# EAGLE board dpager (EAGLE 7.2.0)
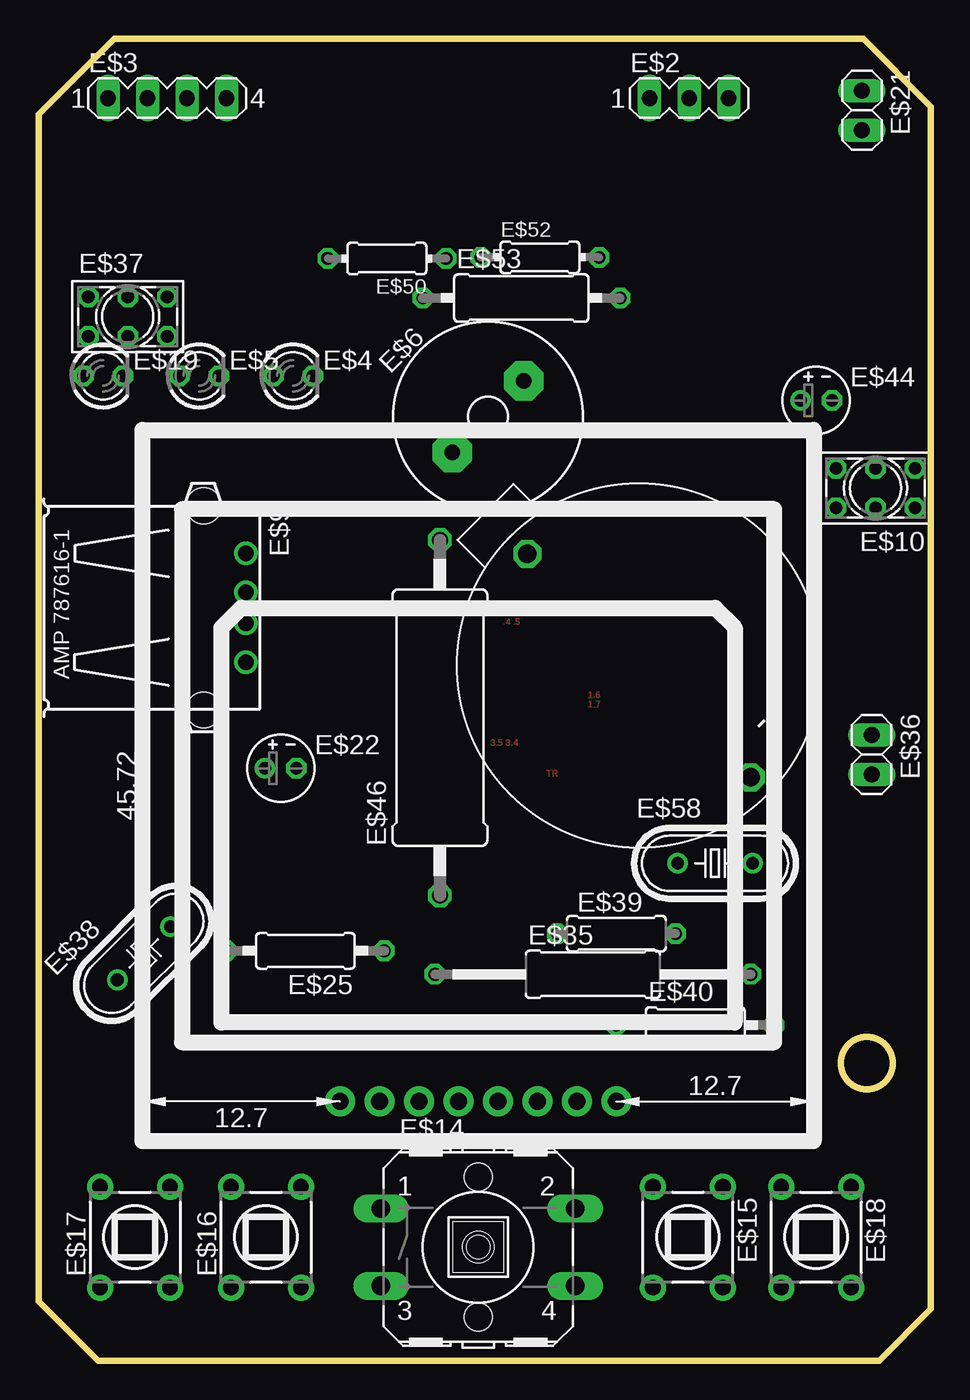
[diagram p0: board, top side]
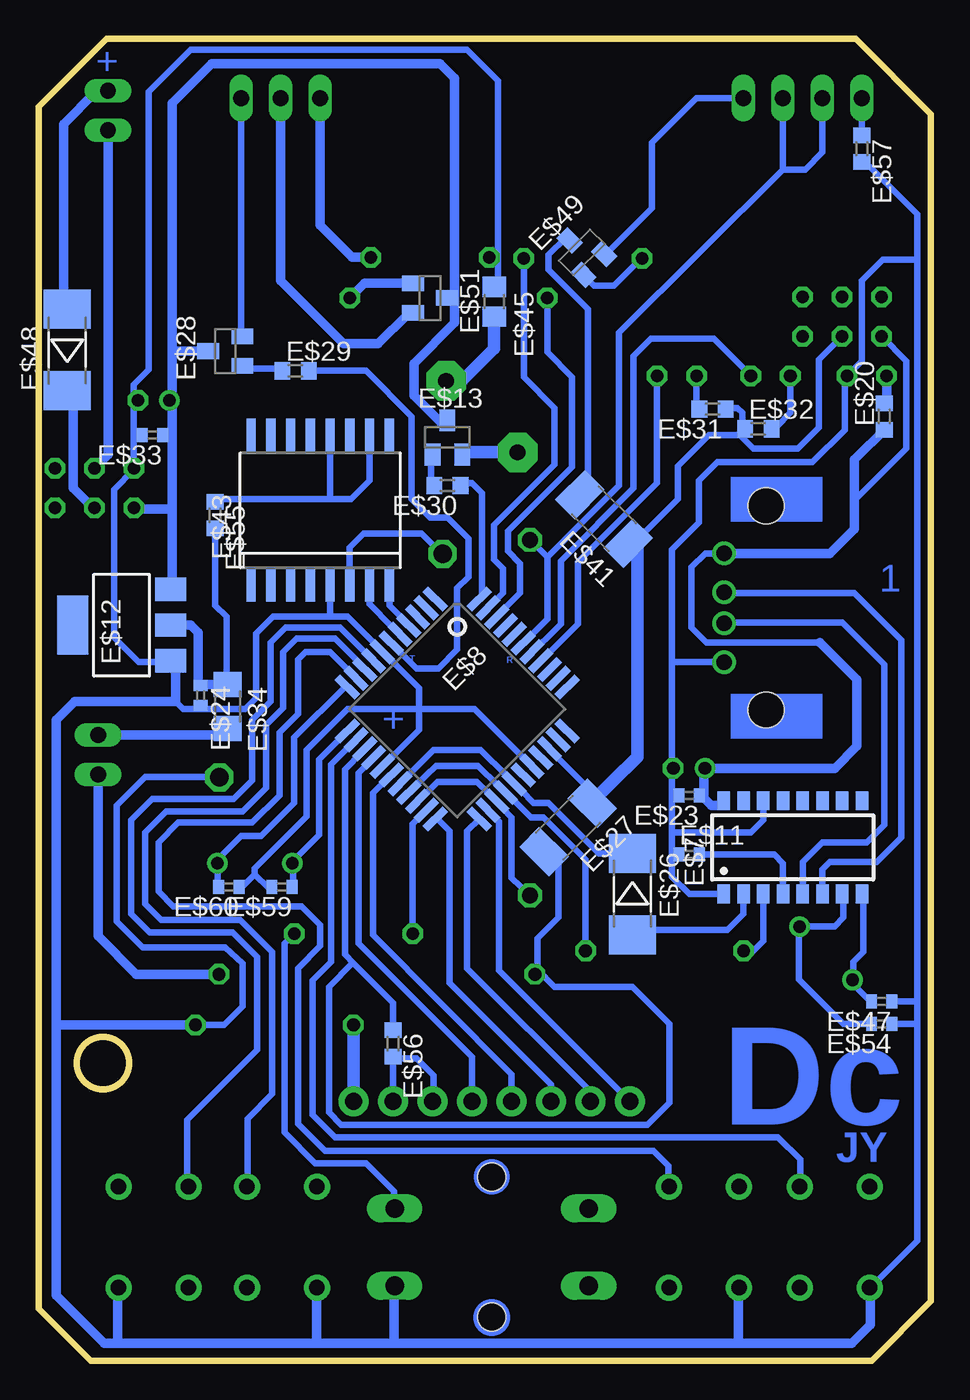
[diagram p1: board, bottom side, seen from below]

Size 57.39 x 85.01 mm. Coordinates in mm from the lower left corner, seen from the top.
Outline: 4.84,85.01 53.02,85.01 57.39,80.64 57.39,3.33 54.05,0 3.81,0 0,3.81 0,80.17 4.84,85.01
Outline: circle at 53.26,19.13 radius 1.67
Copper layers (1*16): Top 0.035mm / dielectric 1.5mm / Bottom 0.035mm
Design rules "default": minimum track width 10mil, minimum drill 24mil, track to track 8mil, track to pad 8mil, pad to pad 8mil, via to via 8mil, smd to smd 8mil, copper to edge 40mil, drill to drill 8mil, minimum pad ring 10mil, minimum via ring 8mil, stop-mask expansion 4mil, vias tented up to drill 0mil, thermal gap 10mil
tRestrict: area 59.7,72.6 to 60.3,74.1; area 59.7,-0.1 to 60.3,1.4; area 60.4,33.2 to 62.4,40.8; area 56,75.1 to 57.5,75.7; area 0,75.1 to 1.5,75.7; area 25.5,73.3 to 32,75; area -3,72.6 to -2.4,74.1; area -3,55 to -2.4,56.5; area -2.3,61.1 to -0.5,68; area -5.7,53.4 to -5.1,54.9; area -5.7,41.7 to -5.1,43.2; area -5,44.8 to -3.2,51.8; 60 more areas; 73 lines

## Footprints (pad centres in the part's own frame; a part is rotated, then mirrored left to right if it is on the bottom)
NOKIA5110 = drill 1.1 pad 1.93: P$1 0,0; P$2 2.54,0; P$3 5.08,0; P$4 7.62,0; P$5 10.16,0; P$6 12.7,0; P$7 15.24,0; P$8 17.78,0
MA03-1 = drill 1.016 long: 1 -2.54,0; 2 0,0; 3 2.54,0
MA04-1 = drill 1.016 long: 1 -3.81,0; 2 -1.27,0; 3 1.27,0; 4 3.81,0
LED3MM = drill 0.813 octagon: A -1.27,0; K 1.27,0
AL60P = drill 1.016 pad 2.54 octagon: 1 -3.251,0; 2 3.251,0
SOP16 = smd 0.8 x 1.2: 1 -4.445,-3; 2 -3.175,-3; 3 -1.905,-3; 4 -0.635,-3; 5 0.635,-3; 6 1.905,-3; 7 3.175,-3; 8 4.445,-3; 9 4.445,3; 10 3.175,3; 11 1.905,3; 12 0.635,3; 13 -0.635,3; 14 -1.905,3; 15 -3.175,3; 16 -4.445,3
QFP44 = smd 0.5 x 1.8: 1 -4,-6; 2 -3.2,-6; 3 -2.4,-6; 4 -1.6,-6; 5 -0.8,-6; 6 0,-6; 7 0.8,-6; 8 1.6,-6; 9 2.4,-6; 10 3.2,-6; 11 4,-6; 23 4,6; 24 3.2,6; 25 2.4,6; 26 1.6,6; 27 0.8,6; 28 0,6; 29 -0.8,6; 30 -1.6,6; 31 -2.4,6; 32 -3.2,6; 33 -4,6 | smd 1.8 x 0.5: 12 6,-4; 13 6,-3.2; 14 6,-2.4; 15 6,-1.6; 16 6,-0.8; 17 6,0; 18 6,0.8; 19 6,1.6; 20 6,2.4; 21 6,3.2; 22 6,4; 34 -6,4; 35 -6,3.2; 36 -6,2.4; 37 -6,1.6; 38 -6,0.8; 39 -6,0; 40 -6,-0.8; 41 -6,-1.6; 42 -6,-2.4; 43 -6,-3.2; 44 -6,-4
USB = drill 1: 1 -3.5,12.99; 2 -1,12.99; 3 1,12.99; 4 3.5,12.99 | hole 2.3: -6.57,10.28; 6.57,10.28
9450-2 = drill 0.813 octagon: 1 -2.54,-1.27; 2 0,-1.27; 3 2.54,-1.27; 4 -2.54,1.27; 5 0,1.27; 6 2.54,1.27
C0402 = smd 0.7 x 0.9: 1 -0.65,0; 2 0.65,0
SOT223 = smd 1.5 x 2: 1 -2.3,-3.15; 2 0,-3.15; 3 2.3,-3.15 | smd 3.8 x 2: 4 0,3.15
SOT23 = smd 1 x 1.4: 1 -0.95,-1.1; 2 0.95,-1.1; 3 0,1.1
B3F-40XX = drill 1.194 long: 1 -6.248,2.489; 2 6.248,2.489; 3 -6.248,-2.489; 4 6.248,-2.489 | hole 1.803: 0,-4.496; 0,4.496
TL1105SP = drill 1 pad 1.676: 1 -2.25,3.25; 2 2.25,3.25; 3 -2.25,-3.25; 4 2.25,-3.25
R0603 = smd 1 x 1.1: 1 -0.85,0; 2 0.85,0
1X02 = drill 1.016 long: 1 -1.27,0; 2 1.27,0
E2-4 = drill 0.813 pad 1.27: + -1.016,0 | drill 0.813 pad 1.27 octagon: - 1.016,0
0207/10 = drill 0.813 octagon: 1 -5.08,0; 2 5.08,0
MELF-MLL41 = smd 2.5 x 3: A 2.625,0; C -2.625,0
R2010 = smd 1.8 x 2.7: 1 -2.2,0; 2 2.2,0
R1206 = smd 1.6 x 1.803: 1 -1.422,0; 2 1.422,0
0309/20 = drill 0.813 octagon: 1 -10.16,0; 2 10.16,0
HC49U-V = drill 0.813: 1 -2.413,0; 2 2.413,0
0207/7 = drill 0.813 octagon: 1 -3.81,0; 2 3.81,0
CR2023 = drill 1.2 octagon: P$1 5.08,13.97; P$2 5.08,-6.35
SOIC16R = smd 0.6 x 2.2: 1 -4.445,-4.775; 2 -3.175,-4.775; 3 -1.905,-4.775; 4 -0.635,-4.775; 5 0.635,-4.775; 6 1.905,-4.775; 7 3.175,-4.775; 8 4.445,-4.775; 9 4.445,4.8; 10 3.175,4.8; 11 1.905,4.8; 12 0.635,4.8; 13 -0.635,4.8; 14 -1.905,4.8; 15 -3.175,4.8; 16 -4.445,4.8
R0805 = smd 1.3 x 1.5: 1 -0.95,0; 2 0.95,0
0617/22 = drill 1.016 octagon: 1 -11.43,0; 2 11.43,0
0204/7 = drill 0.813 octagon: 1 -3.81,0; 2 3.81,0
0309/12 = drill 0.813 octagon: 1 -6.35,0; 2 6.35,0

## Placement (x,y rotation side)
E$1  [NOKIA5110]  19.37,16.67 0 top
E$2  [MA03-1]  41.83,81.2 0 top
E$3  [MA04-1]  8.25,81.2 0 top
E$4  [LED3MM]  16.35,63.34 0 top
E$5  [LED3MM]  10.32,63.34 0 top
E$6  [AL60P]  28.89,60.72 45 top
E$7  [SOP16]  8.89,33.02 0 bottom
E$8  [QFP44]  30.48,41.91 225 bottom
E$9  [USB]  0.32,48.42 270 top
E$10  [9450-2]  53.82,56.12 180 top
E$11  [C0402]  15.56,32.54 0 bottom
E$12  [SOT223]  52.07,47.31 90 bottom
E$13  [SOT23]  31.11,59.37 0 bottom
E$14  [B3F-40XX]  28.26,7.3 0 top
E$15  [TL1105SP]  41.75,7.94 180 top
E$16  [TL1105SP]  14.61,7.94 0 top
E$17  [TL1105SP]  6.19,7.94 0 top
E$18  [TL1105SP]  50.01,7.94 180 top
E$19  [LED3MM]  4.13,63.34 0 top
E$20  [R0603]  3.02,60.72 90 bottom
E$21  [1X02]  52.94,80.41 270 top
E$22  [E2-4]  15.56,38.1 0 top
E$23  [C0402]  15.56,36.35 180 bottom
E$24  [C0402]  46.99,42.78 270 bottom
E$25  [0207/10]  17.14,26.35 180 top
E$26  [MELF-MLL41]  19.21,30 270 bottom
E$27  [R2010]  23.34,34.29 225 bottom
E$28  [SOT23]  45.4,64.93 90 bottom
E$29  [R0603]  40.88,63.66 0 bottom
E$30  [R0603]  31.11,56.28 180 bottom
E$31  [R0603]  14.05,61.2 180 bottom
E$32  [R0603]  11.11,59.93 0 bottom
E$33  [C0402]  50.09,59.53 180 bottom
E$34  [R1206]  45.24,42.07 270 bottom
E$35  [0309/20]  35.64,24.84 0 top
E$36  [1X02]  53.58,38.97 270 top
E$37  [9450-2]  5.71,67.15 0 top
E$38  [HC49U-V]  6.75,26.19 45 top
E$39  [0207/7]  37.15,27.46 0 top
E$40  [0207/10]  42.23,21.59 0 top
E$41  [R2010]  21.03,54.13 135 bottom
E$42  [CR2023]  37.7,38.42 45 top
E$43  [SOIC16R]  39.29,54.69 0 bottom
E$44  [E2-4]  50.01,61.75 0 top
E$45  [R0805]  28.1,68.1 270 bottom
E$46  [0617/22]  25.8,41.35 90 top
E$47  [C0402]  3.17,23.1 180 bottom
E$48  [MELF-MLL41]  55.56,65.01 90 bottom
E$49  [SOT23]  22.46,71.28 45 bottom
E$50  [0204/7]  22.38,70.88 180 top
E$51  [SOT23]  32.23,68.34 270 bottom
E$52  [0204/7]  32.23,70.96 0 top
E$53  [0309/12]  31.04,68.34 0 top
E$54  [C0402]  3.17,21.67 180 bottom
E$55  [R0603]  46.04,54.37 270 bottom
E$56  [R0603]  34.61,20.4 270 bottom
E$57  [R0603]  4.45,77.95 270 bottom
E$58  [HC49U-V]  43.5,31.99 0 top
E$59  [C0402]  41.75,30.48 180 bottom
E$60  [C0402]  45.16,30.48 180 bottom

## Library data of the parts
E$1 = nokia5110
E$2 E$3 = con-lstb
E$4 E$5 E$19 = led
E$6 = buzzer
E$7 = relay
E$8 = freescale
E$9 = con-amp
E$10 E$37 = switch-misc
E$11 E$20 E$23-E$25 E$27 E$29-E$34 E$40 E$41 E$45 E$47 E$50 E$52 E$54-E$57 E$59 E$60 = eagle-ltspice
E$12 = v-reg
E$13 E$28 E$49 E$51 = transistor-npn
E$14 = switch-omron
E$15-E$18 = switch
E$21 E$36 = pinhead
E$22 E$35 E$39 E$44 E$46 E$53 = rcl
E$26 E$48 = diode
E$38 E$58 = crystal
E$42 = sbattery
E$43 = analog-devices

## Nets
S$5: E$1.P$5
S$10: E$19.A
S$11: E$21.2
S$14: E$19.K
S$15: E$25.2
S$17: E$25.1
S$20: E$2.3
S$22: E$5.A
S$23: E$4.A
S$24: E$5.K
S$28: E$3.2 E$3.3 E$46.2
S$30: E$4.K
S$32: E$36.1
S$33: E$35.2 E$36.2
S$36: E$1.P$2
S$39: E$1.P$4
S$45: E$39.1
S$49: E$1.P$8 E$40.1
S$55: E$2.2
S$57: E$2.1
S$58: E$46.1
S$59: E$21.1
S$61: E$3.4
S$62: E$50.1
S$65: E$50.2
S$66: E$53.2
S$67: E$53.1
S$69: E$40.2
S$71: E$10.2
S$74: E$1.P$7

## Tracks (layer width: path | path; a pad name or v marks a point on that pad's centre or on a via)
S$1
  Bottom 0.813: 30.08,58.42 26.51,58.42
S$2
  Bottom 0.406: 36.59,39.13 37.7,38.02 37.7,26.11 37.15,25.56 | 37.15,25.56 34.61,23.02 34.61,21.27 | 23.97,32.31 23.97,28.5 25.32,27.15 25.32,25.16 24.21,24.05 19.21,24.05 16.83,21.67 16.83,16.59 18.26,15.16 37.94,15.16 38.73,15.95 38.73,24.05 37.23,25.56 37.15,25.56
S$3
  Bottom 0.61: 55.17,61.59 55.17,56.12 53.82,54.77
S$4
  Bottom 0.406: 18.97,51.83 18.89,52.47
  Bottom 0.813: 18.89,52.47 18.89,38.81 22.07,35.72
S$5
  Bottom 0.406: 35.48,39.13 36.83,37.78 36.83,26.83 29.53,19.53 E$1.P$5
S$6
  Bottom 0.406: 13.33,47.47 5.71,47.47 3.02,44.77 3.02,34.45 4.13,33.34 6.98,33.34 8.25,32.07 8.25,30
S$7
  Bottom 0.406: 6.98,30 6.98,31.59 6.51,32.07 3.49,32.07 1.9,33.65 1.9,46.35 4.92,49.37 13.33,49.37
S$8
  Bottom 0.406: 12.22,59.45 11.43,58.66 8.57,58.66 7.22,60.01 7.22,64.37 5.71,65.88
S$9
  Bottom 0.61: 48.42,47.31 47.62,47.31 47.15,46.83 47.15,43.5 45.16,43.5
S$10
  Bottom 0.61: E$19.A 2.86,61.67
S$11
  Bottom 0.61: E$21.2 52.94,58.26 53.26,57.94
S$12
  Bottom 0.406: 12.06,29.69 12.06,28.73 13.1,27.7 19.29,27.7
S$13
  Bottom 0.406: 9.52,30 9.52,31.99 10.08,32.54 14.92,32.54
S$14
  Bottom 0.406: 10.79,35.88 10.79,34.77 11.59,33.97 16.67,33.97 | 13.33,30 15.56,30 16.67,31.11 16.67,32.38 | 13.33,44.93 16.67,44.93 | 16.67,44.93 16.67,52.15 14.92,53.9 14.92,56.59 13.73,57.78 7.62,57.78 5.56,59.85 5.56,63.18 E$19.K 4.44,64.29 4.44,69.45 3.1,70.8 0.87,70.8 | 16.67,32.38 16.67,33.97 | 16.67,33.97 16.67,44.93 | 16.51,32.38 16.67,32.38 | 0.87,70.8 0.87,73.74 4.44,77.31 | 0.87,70.8 0.87,23.1 | 0.87,23.1 0.87,21.67 | 0.87,21.67 0.87,7.7 3.89,4.68 | 2.46,23.1 0.87,23.1 | 2.54,21.67 0.87,21.67
S$15
  Bottom 0.406: 10.79,30 10.79,26.99 11.43,26.35 E$25.2
S$16
  Bottom 0.406: 26.35,36.67 25.56,35.88 24.61,35.88 21.35,32.62 19.13,32.62
S$17
  Bottom 0.406: 27.3,36.51 25.72,34.92 24.92,34.92 22.22,32.23 E$25.1
S$18
  Bottom 0.406: 24.45,39.21 20.64,35.4
S$19
  Bottom 0.406: 25.4,37.94 25.24,37.78
S$20
  Bottom 0.406: E$2.3 44.37,66.04
S$21
  Bottom 0.61: 48.82,64.93 48.82,80.88 46.28,83.42 31.59,83.42 30.64,82.47 30.64,66.75 33.26,64.13 33.26,62.07 31.51,60.32 | 48.82,64.93 48.82,54.77 | 48.82,54.77 51.28,54.77 | 48.82,54.77 48.82,49.53 | 46.51,64.93 48.82,64.93
S$22
  Bottom 0.406: 9.92,60.09 9.05,60.96 E$5.A
S$23
  Bottom 0.406: 15.08,61.67 E$4.A
S$24
  Bottom 0.406: E$5.K 13.97,65.72 18.02,65.72 19.13,64.61 19.13,56.12 23.81,51.43 23.81,47.39 25.96,45.24
S$25
  Bottom 0.406: 44.53,63.82 41.67,63.82
S$26
  Bottom 0.406: 39.85,63.66 36.35,63.66 33.42,60.72 33.42,55.4 32.23,54.21 31.11,54.21 29.77,52.86 29.77,50.4 30.48,49.69 30.48,45.72 31.67,44.53 33.1,44.53 34.61,46.04
S$27
  Bottom 0.406: 32.15,57.78 32.15,56.67
S$28
  Bottom 0.406: E$3.2 6.98,77.71 8.1,76.6 9.52,76.6 | E$3.3 9.52,76.6 | 9.52,76.6 20.08,66.12 20.08,56.28 24.69,51.67 | 24.69,51.67 24.69,47.7 26.35,46.04 | E$46.2 24.69,51.67
S$29
  Bottom 0.406: 27.86,70.96 27.86,82.31 29.84,84.3 47.62,84.3 50.32,81.6 50.32,63.74 51.28,62.79 51.28,57.31 52.55,56.04 52.55,46.51 50.96,44.93 48.89,44.93 | 27.86,70.96 27.86,69.14 | 28.26,70.96 27.86,70.96
S$30
  Bottom 0.406: E$4.K 17.62,56.44 22.7,51.36 22.7,47.39 25.48,44.61
S$31
  Bottom 0.406: 29.05,48.97 28.89,49.13 28.89,55.8 29.53,56.44 30.32,56.44
S$32
  Bottom 0.61: 45.32,40.24 E$36.1
S$33
  Bottom 0.61: E$36.2 53.58,27.3 51.12,24.84 E$35.2
S$34
  Bottom 0.406: 3.17,65.88 1.59,64.29 1.59,58.66 4.92,55.32 | 13.33,51.91 14.53,51.91 15.4,51.04 15.4,47.15 14.45,46.2 7.14,46.2
  Bottom 0.61: 13.33,51.91 6.51,51.91 4.92,53.5 4.92,55.32 4.92,57.94 2.86,60.01 | 7.14,46.2 4.76,43.81 4.76,39.53 6.19,38.1 14.6,38.1 14.6,36.19 14.13,35.72 13.33,35.72
S$35
  Bottom 0.406: 28.73,35.72 27.78,34.69 27.78,25.08 19.37,16.67 19.37,16.59
S$36
  Bottom 0.406: E$1.P$2 21.91,17.3 29.84,25.24 29.84,34.05 29.05,34.85
S$37
  Bottom 0.406: 24.45,16.59 24.45,17.78 30.96,24.29 30.96,34.05 31.83,34.92
S$38
  Bottom 0.406: 35.64,44.77 38.02,47.15 41.51,47.15 42.47,46.2 42.47,42.39 43.66,41.2 43.66,37.31 44.85,36.12 50.09,36.12 51.43,34.77 51.43,28.73 50.24,27.54 44.93,27.54 43.34,25.96 43.34,20 47.86,15.48 47.86,11.19
S$39
  Bottom 0.406: 34.69,37.7 35.88,36.51 35.88,27.38 26.99,18.41 E$1.P$4
S$40
  Bottom 0.406: 37.07,39.85 38.58,38.34 38.58,25.64 39.77,24.45 39.77,15.8 38.34,14.37 9.84,14.37 8.41,12.94 8.41,11.19
S$41
  Bottom 0.406: 28.42,36.43 29.21,37.23 31.75,37.23 32.78,36.19
S$42
  Bottom 0.61: 12.38,4.68 12.38,1.19
S$43
  Bottom 0.406: 40.96,27.46 41.59,26.83 41.59,14.68 39.61,12.7 36.35,12.7 34.53,10.87 34.53,9.76
S$44
  Bottom 0.406: 22.94,40 23.73,40.8
S$45
  Bottom 0.406: 32.78,35.08 33.34,34.53 E$39.1
S$46
  Bottom 0.406: 22.94,43.74 23.42,43.26
S$47
  Bottom 0.406: 5.64,29.92 5.64,28.5 6.19,27.94 8.49,27.94 8.49,24.53 5.64,21.67 3.81,21.67 3.73,21.59
S$48
  Bottom 0.406: 38.02,43.74 37.7,43.34 40.96,40.08 40.96,35.88 43.1,33.73 44.37,33.73 45.88,32.23 45.88,30.4
S$49
  Bottom 0.813: E$40.1 E$1.P$8
S$50
  Bottom 0.406: 34.85,49.45 34.85,48.58 33.89,47.62
S$51
  Bottom 0.406: 36.12,49.45 36.12,48.66 34.69,47.23
S$52
  Bottom 0.406: 46.04,53.74 46.04,48.58 45.32,47.86 45.32,43.81
S$53
  Bottom 0.406: 31.43,51.83 32.78,53.18 36.51,53.18 37.39,52.31 37.39,50.48
S$54
  Bottom 0.406: 36.12,59.61 36.12,56.59 37.31,55.4 38.66,55.4 | 38.66,55.4 46.12,55.4 | 38.66,58.74 38.66,55.4
S$55
  Bottom 0.61: 33.73,67.39 33.65,67.31 35.56,65.4 37.78,65.4 41.83,69.45 E$2.2
S$56
  Bottom 0.813: 28.1,67.15 28.1,65.09 30.16,63.02 31.27,63.02
S$57
  Bottom 0.61: E$2.1 39.29,73.02 37.23,70.96 36.35,70.96
S$58
  Bottom 0.406: 28.1,36.12 26.99,34.92 26.99,31.04 E$46.1
S$59
  Bottom 0.406: 55.8,67.47 55.88,67.39
  Bottom 0.61: E$21.1 53.74,81.6 55.8,79.53 55.8,67.47
S$60
  Bottom 0.406: 27.3,37.62 28.97,39.29 31.99,39.29 33.81,37.46
S$61
  Bottom 0.406: 12.06,81.28 E$3.4 15.08,81.2 17.94,78.34 17.94,74.14 20.8,71.28
S$62
  Bottom 0.406: 28.18,48.74 27.54,49.37 27.54,50.96 28.1,51.51 28.1,53.74 24.21,57.63 24.21,61.28 26.19,63.26 E$50.1
S$63
  Bottom 0.406: 23.49,72.23 24.61,71.12 24.61,70.17 22.07,67.63 22.07,56.12
S$64
  Bottom 0.406: 13.02,61.28 12.46,61.28 12.14,60.96 12.14,59.85 12.46,59.53 14.29,59.53 16.27,57.55 16.27,55.4 18.81,52.86
S$65
  Bottom 0.406: E$50.2 18.65,70.88 20.4,69.14 21.67,69.14 22.3,69.77
S$66
  Bottom 0.61: 33.34,69.29 36.43,69.29 E$53.2
S$67
  Bottom 0.406: E$53.1 24.69,64.85 23.1,63.26 23.1,57.47 27.23,53.34 27.23,52.07 26.43,51.28 26.43,49.37 27.78,48.02
S$68
  Bottom 0.406: 27.86,36.99 29.13,38.26 31.83,38.26 33.73,36.43
S$69
  Bottom 0.406: 35.64,45.96 37.54,47.86 38.66,47.86 | 38.66,49.45 38.66,47.86 | 38.66,47.86 42.31,47.86 43.42,46.75 43.42,42.62 44.13,41.91 48.1,41.91 48.58,42.39 | E$40.2 45.48,21.59 44.29,22.78 44.29,25.56 45.4,26.59 50.72,26.59 52.39,28.26 52.39,35.72 50.56,37.54 45.8,37.54
  Bottom 0.61: 48.58,44.61 48.58,42.39 55.09,42.39 56.28,41.2 56.28,21.59 | 56.28,21.59 56.28,4.21 53.18,1.11 52.31,1.11 | 52.31,1.11 39.53,1.11 | 39.53,1.11 34.53,1.11 | 34.53,1.11 5.08,1.11 3.89,2.3 3.89,4.68 | 34.53,4.76 34.53,1.11 | 52.31,4.68 52.31,1.11 | E$40.2 56.28,21.59 | 39.53,4.6 39.53,1.11
S$70
  Bottom 0.406: 26.19,38.73 29.37,41.91 37.54,41.91 40.16,39.29 40.16,35 43.5,31.67 43.5,31.27 | 43.5,31.27 42.62,30.4 | 43.5,31.27 44.37,30.4
S$71
  Bottom 0.61: 52.94,58.26 E$10.2
S$72
  Bottom 0.406: 37.39,44.37 37.46,44.37 38.66,45.56 40.24,45.56 40.72,45.08 40.72,41.59 41.91,40.4 41.91,36.35 43.66,34.61 48.42,34.61 49.69,33.34 49.69,30.16 48.74,29.21 40.48,29.21 39.29,28.02 39.29,26.67 40.72,25.24 40.72,15.24 38.97,13.49 17.86,13.49 16.91,12.54 16.91,11.11
S$73
  Bottom 0.406: 4.37,29.84 4.37,26.27 5,25.64 5,24.21 3.89,23.1
S$74
  Bottom 0.406: E$1.P$7 34.61,19.45 33.1,19.45 31.99,18.34 31.99,16.67
S$75
  Bottom 0.406: 36.51,44.61 38.34,46.43 40.8,46.43 41.67,45.56 41.67,41.99 42.78,40.88 42.78,36.83 44.29,35.32 49.21,35.32 50.56,33.97 50.56,29.37 49.53,28.34 44.45,28.34 42.39,26.27 42.39,17.14 43.97,15.56 43.97,11.19
S$76
  Bottom 0.406: 4.44,81.12 4.44,78.82
S$77
  Bottom 0.406: 38.02,40.08 37.94,40.08 39.37,38.66 39.37,33.81 41.04,32.15 41.04,30.4
S$78
  Bottom 0.406: 35.16,45.48 32.94,43.26 32.94,40.56 34.85,38.66 34.92,38.66
(copper drawn outside any net)
  shapes: Bottom area x2, Bottom circle x2

## Text on the board
Top: .4 .5 | 1.6 / 1.7 | 3.5 3.4 | TR
Bottom: + | 1 | R | T | + | Dc | JY